# EAGLE board teabox (EAGLE 4.11), part 1 of 2
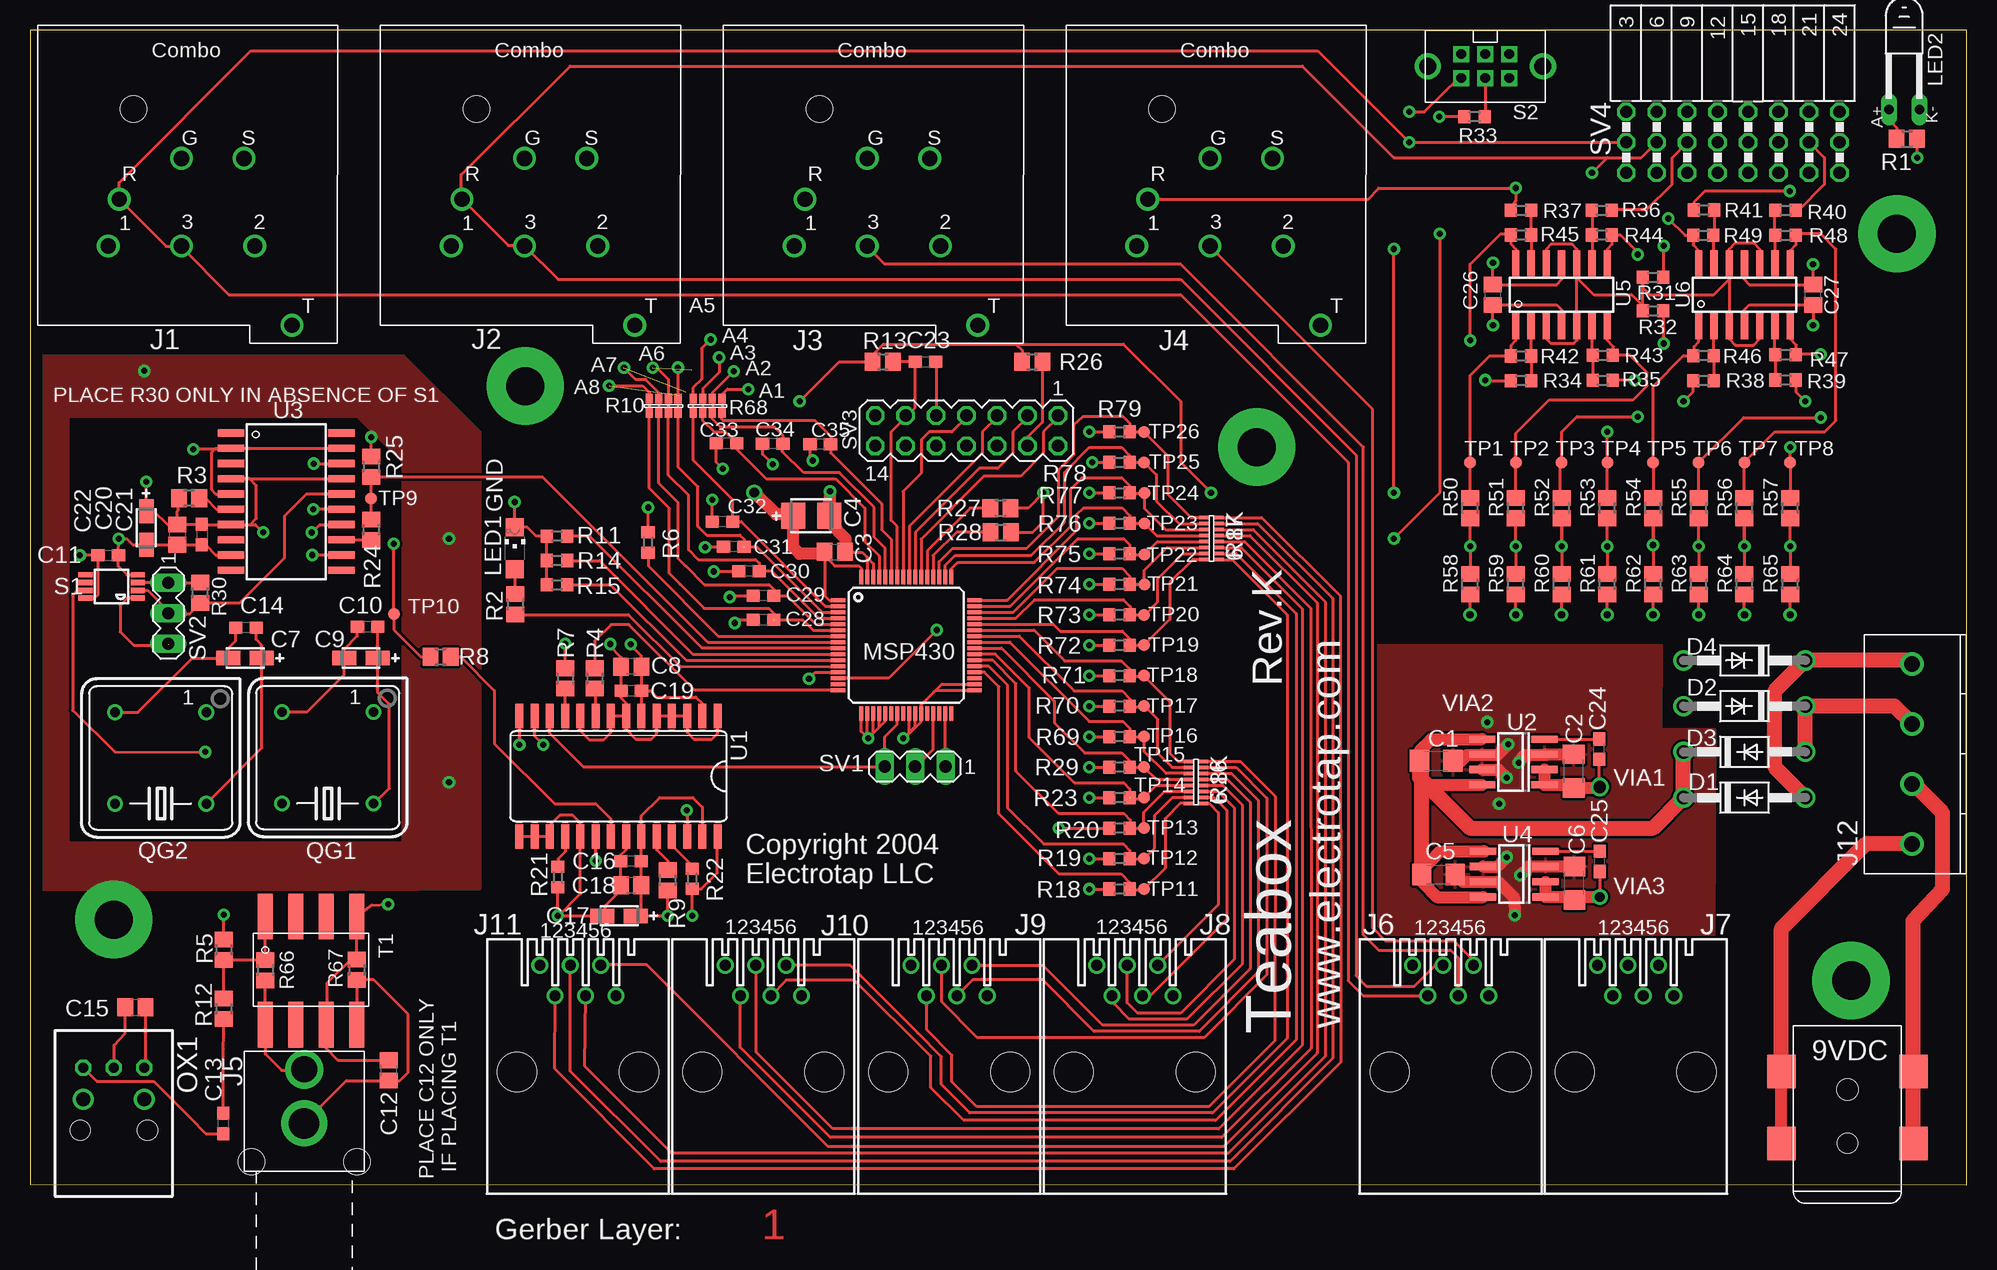
[diagram p0: board, top side]
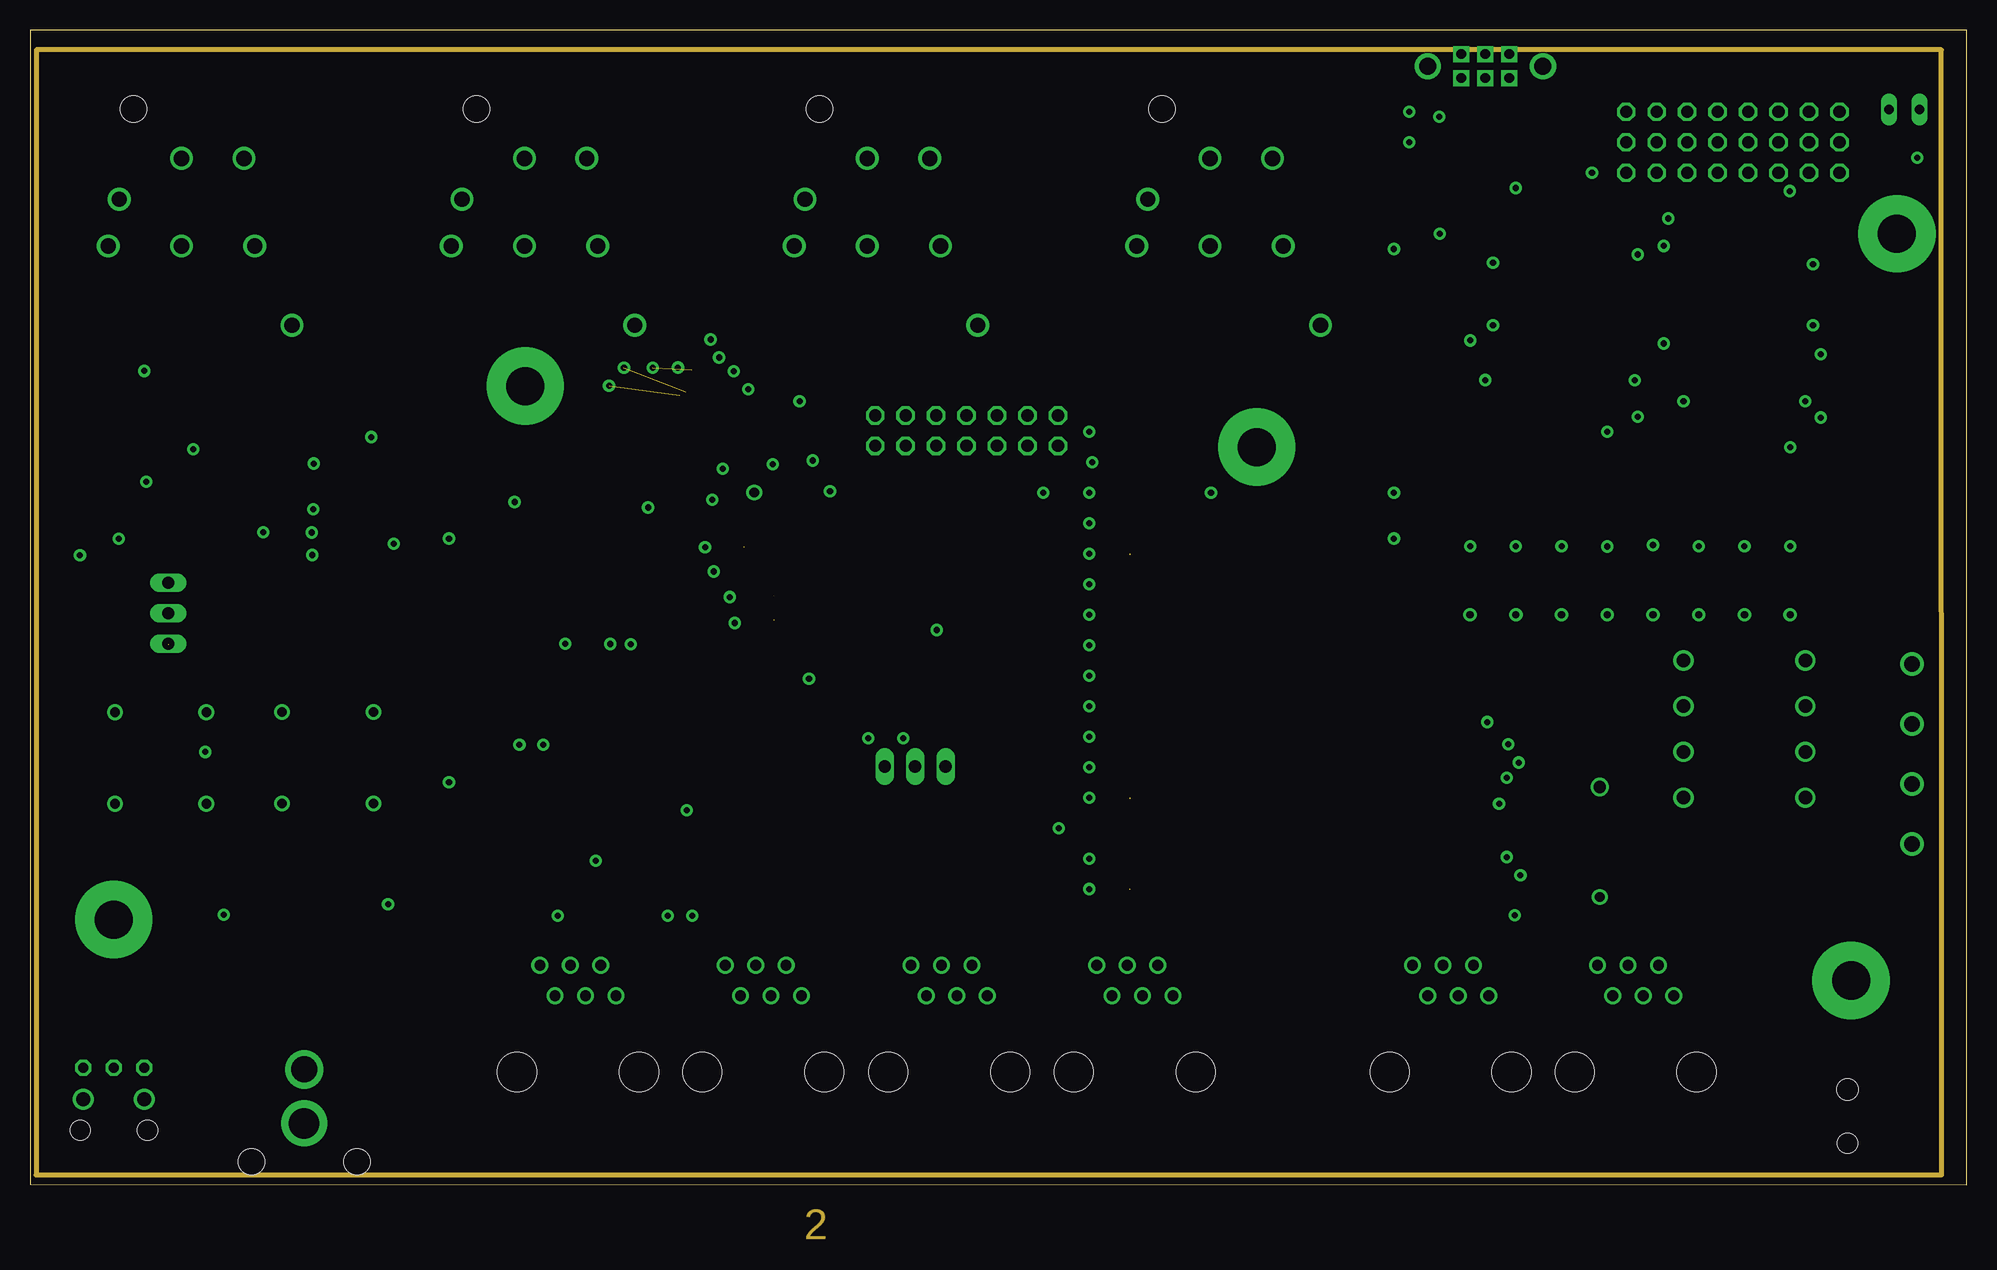
[diagram p1: board, inner layer $GND]
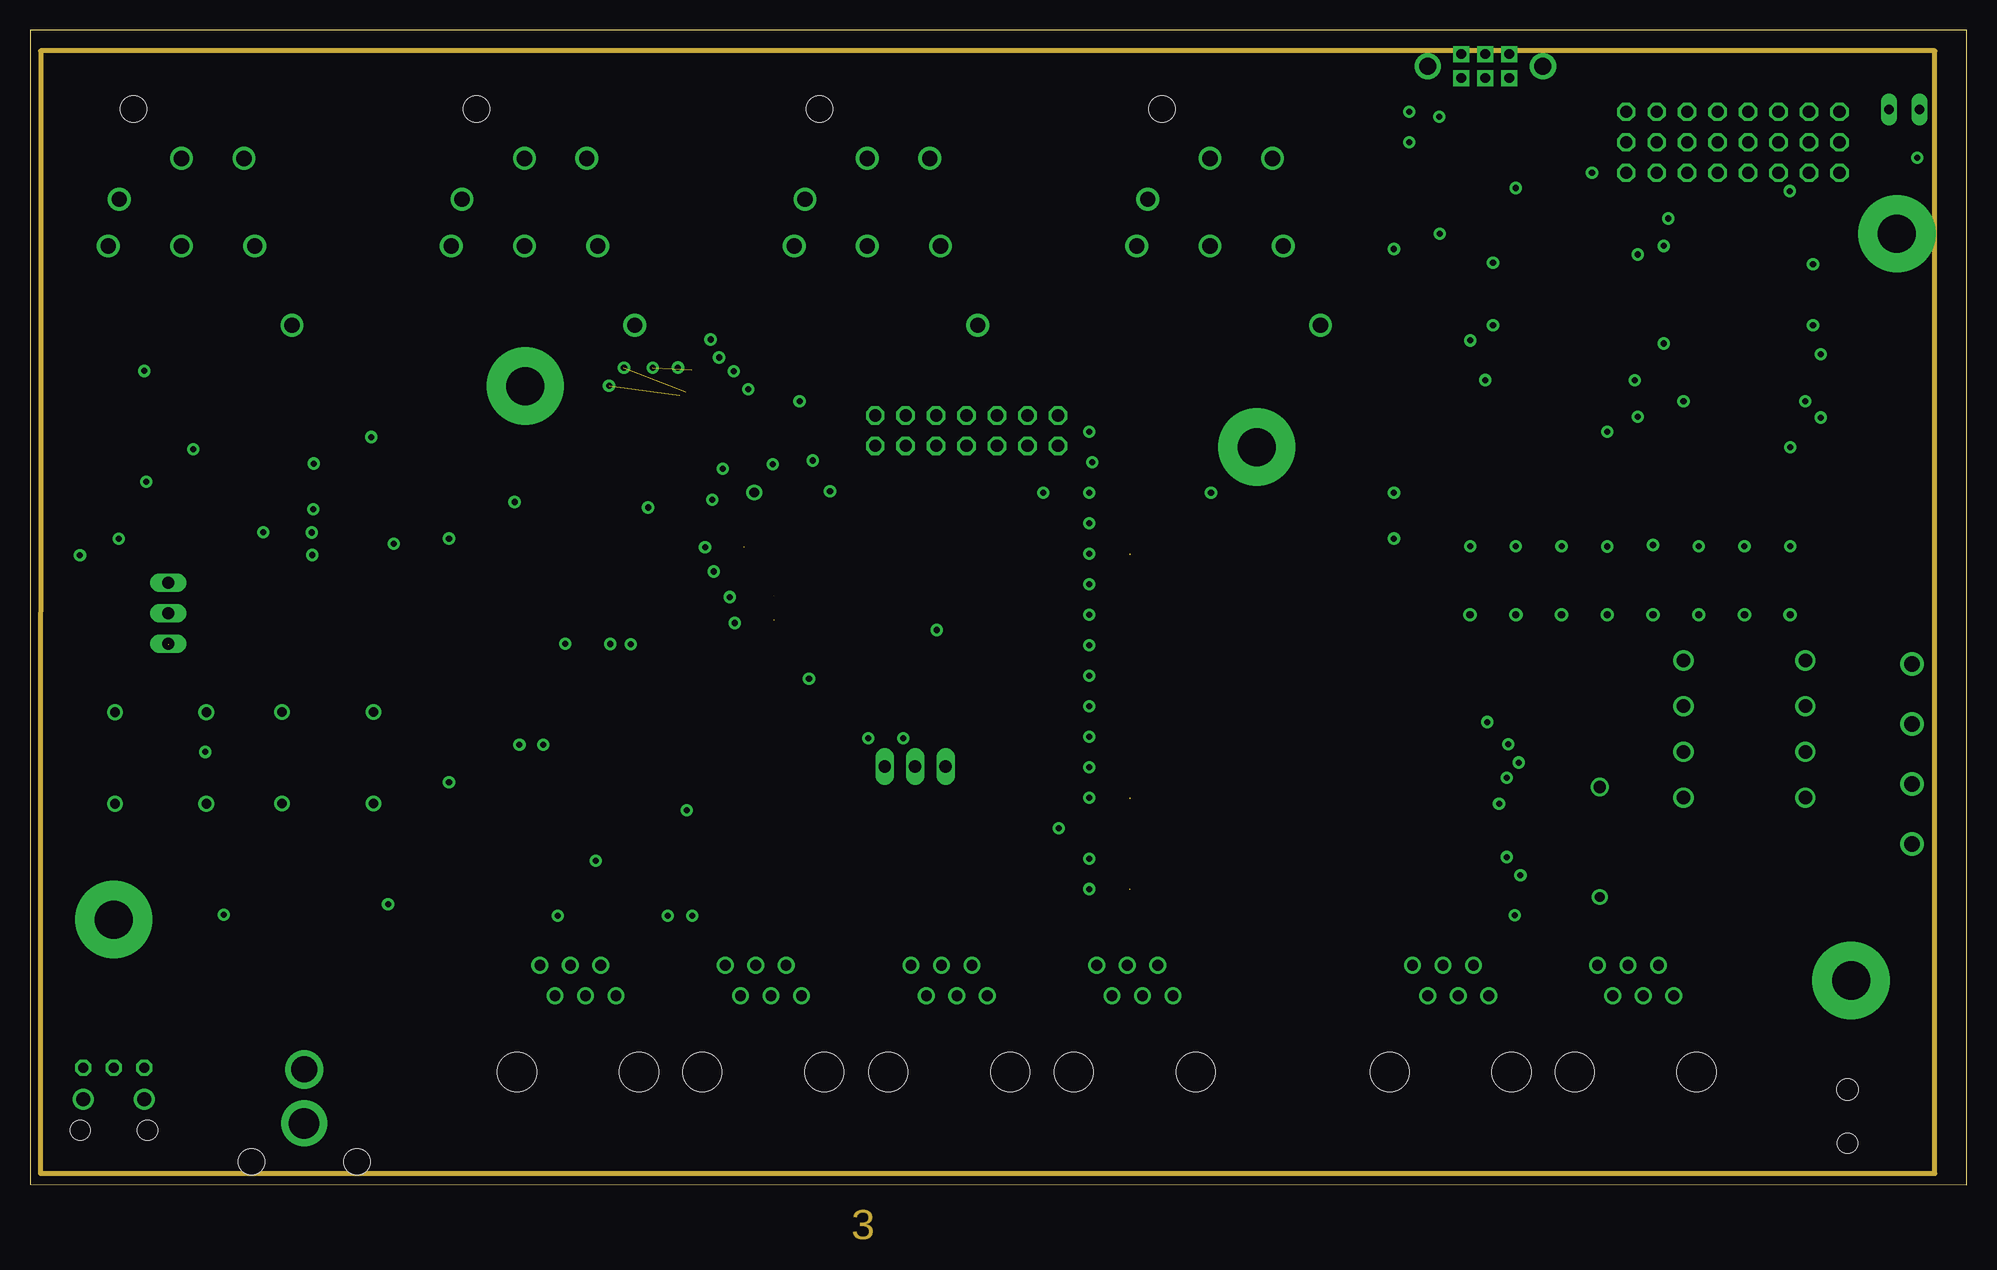
[diagram p2: board, inner layer $+5V]
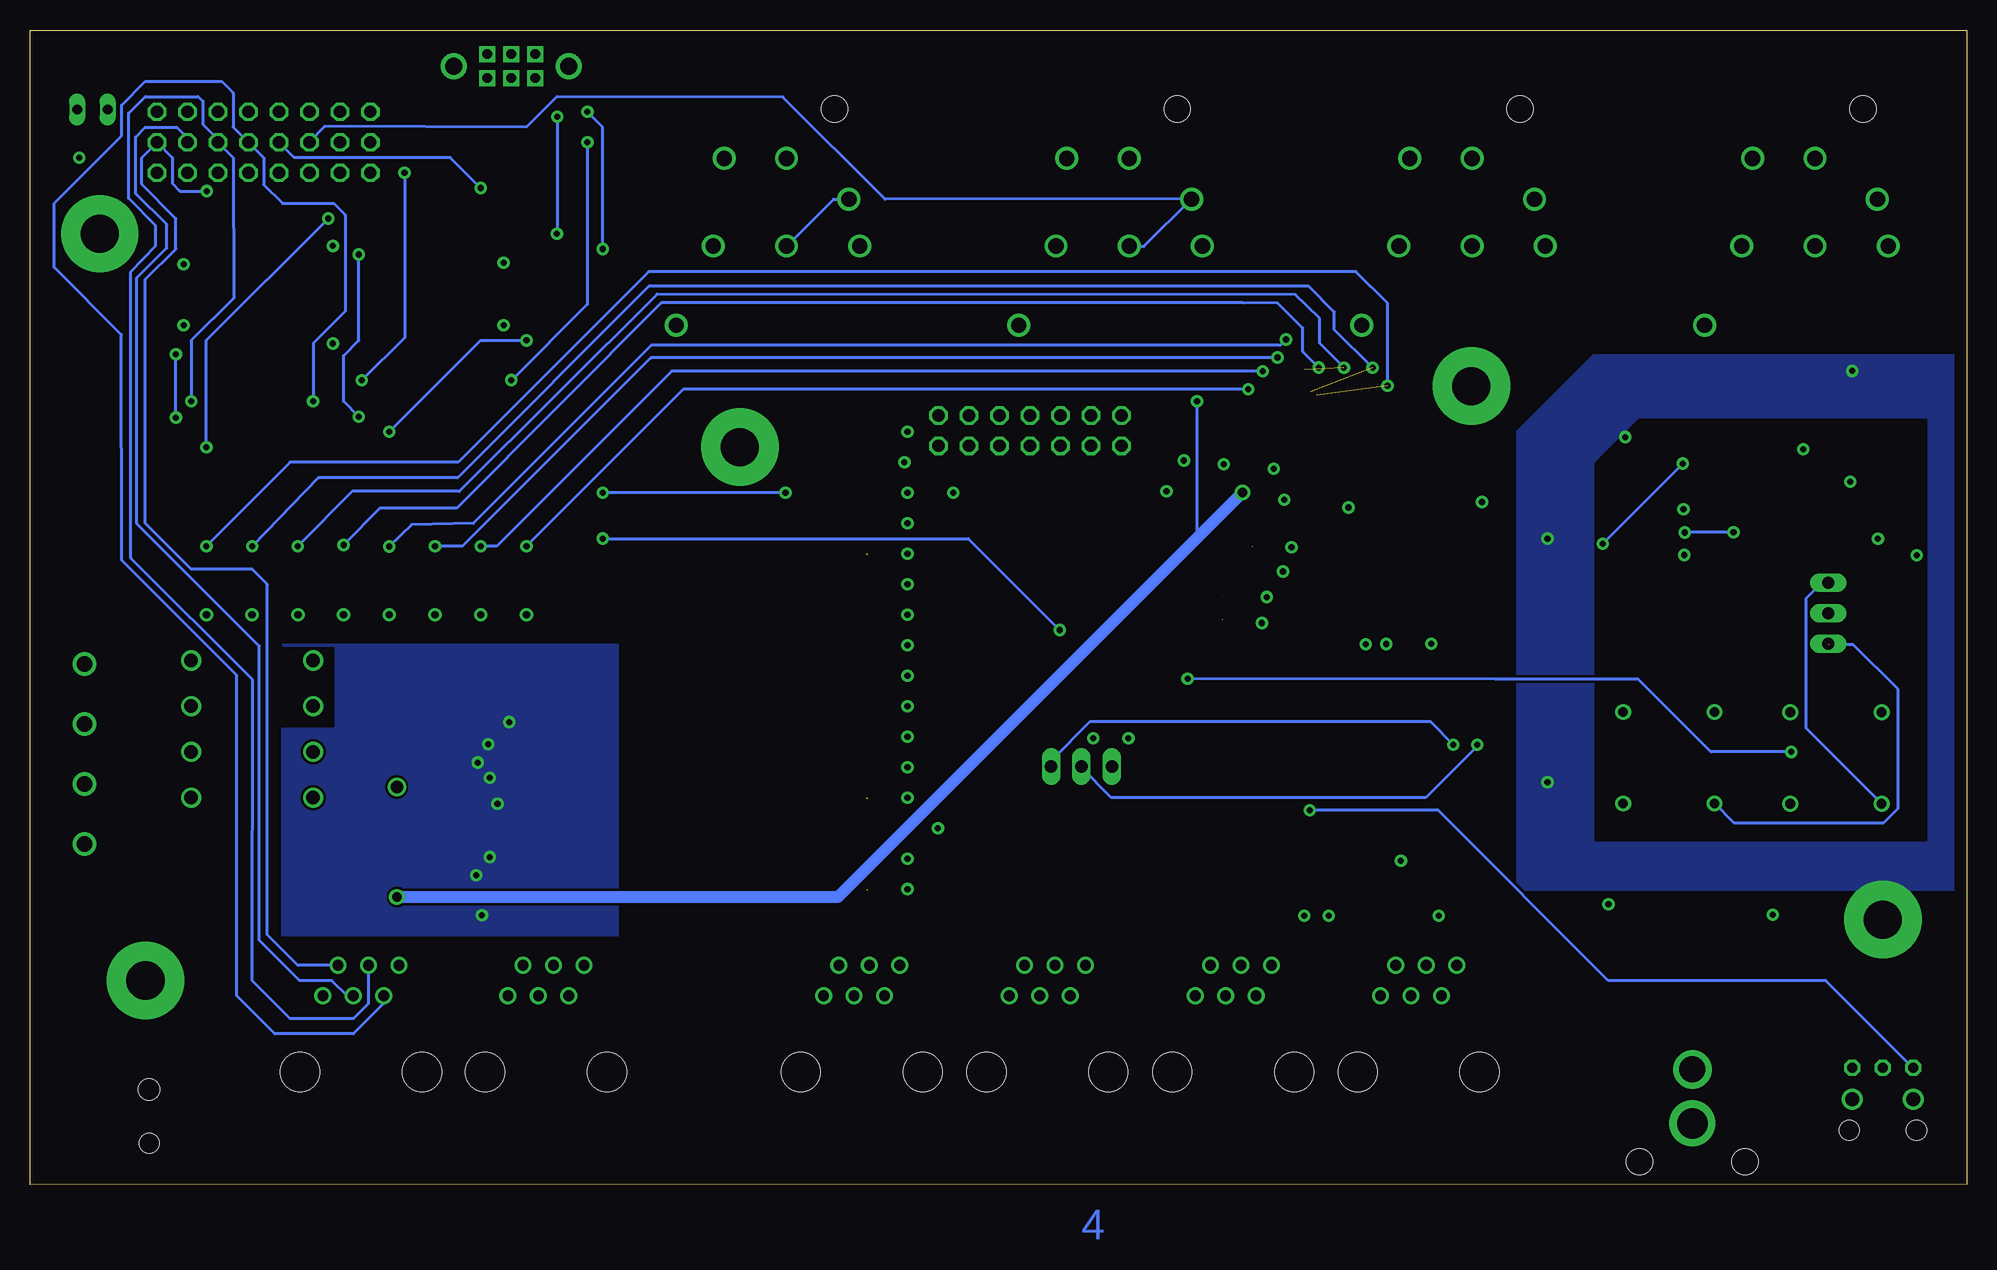
[diagram p3: board, bottom side, seen from below]

Size 161.38 x 96.22 mm. Coordinates in mm from the lower left corner, seen from the top.
Outline: 0,0.03 161.38,0 161.38,96.19 0,96.22 0,0.03
Copper layers (1*2+15*16): Top 0.035mm / dielectric 1.5mm / $GND 0.035mm / dielectric 0.15mm / $+5V 0.035mm / dielectric 0.2mm / Bottom 0.035mm
Design rules "default": minimum track width 10mil, minimum drill 20mil, track to track 8mil, track to pad 8mil, pad to pad 7mil, via to via 8mil, smd to smd 7mil, copper to edge 40mil, drill to drill 8mil, minimum pad ring 10mil, minimum via ring 10mil, stop-mask expansion 4mil, vias tented up to drill 0mil, thermal gap 10mil

## Footprints (pad centres in the part's own frame; a part is rotated, then mirrored left to right if it is on the bottom)
POWER_CONNECTOR = smd 2.4 x 2.8: +1 10,-5; +2 10,-11; -1 -1,-5; -2 -1,-11 | hole 1.778: 4.5,-9.5 | hole 1.676: 4.5,-5
C1206 = smd 1.6 x 1.8: 1 -1.4,0; 2 1.4,0
C0805 = smd 1.3 x 1.5: 1 -0.85,0; 2 0.85,0
CT3528 = smd 2 x 2.2: + 1.5,0; - -1.5,0
CT3216 = smd 2 x 1.2: + 1.4,0; - -1.4,0
C0603 = smd 1.1 x 1: 1 -0.85,0; 2 0.85,0
DO41-10 = drill 1.118 round: A 5.08,0; C -5.08,0
NEUTRIK_COMBO_CONNECTOR_H = drill 1.27 round: 1 5.9,6.6; 2 18.1,6.6; 3 12,6.6; G 12,13.9; R 6.8,10.5; S 17.2,13.9; T 21.2,0 | hole 2.184: 8,18
JACK_RCA_CUI_RCJ-04X = drill 2.54 pad 3.81 round: 1-GND 4,-5 | drill 2.184 pad 2.54 round: 2-SIG 8.5,-5 | hole 2.184: 0.8,-0.6; 0.8,-9.4
TELEPHONE_JACK = drill 0.889 round: 1 -3.175,8.89; 2 -1.905,6.35; 3 -0.635,8.89; 4 0.635,6.35; 5 1.905,8.89; 6 3.175,6.35 | hole 3.251: -5.08,0; 5.08,0
TERMINAL_BLOCK_4 = drill 1.3 round: P$1 2.5,0; P$2 7.5,0; P$3 12.5,0; P$4 17.5,0
CHIPLED_1206 = smd 1.5 x 1.5: A 0,-1.75; C 0,1.75
LED-3MM-RA = drill 0.813 long: A 3.62,-1.27; K 3.62,1.27
TQFP64-10X10 = smd 1.2 x 0.3: 1 -5.7,3.75; 2 -5.7,3.25; 3 -5.7,2.75; 4 -5.7,2.25; 5 -5.7,1.75; 6 -5.7,1.25; 7 -5.7,0.75; 8 -5.7,0.25; 9 -5.7,-0.25; 10 -5.7,-0.75; 11 -5.7,-1.25; 12 -5.7,-1.75; 13 -5.7,-2.25; 14 -5.7,-2.75; 15 -5.7,-3.25; 16 -5.7,-3.75; 33 5.7,-3.75; 34 5.7,-3.25; 35 5.7,-2.75; 36 5.7,-2.25; 37 5.7,-1.75; 38 5.7,-1.25; 39 5.7,-0.75; 40 5.7,-0.25; 41 5.7,0.25; 42 5.7,0.75; 43 5.7,1.25; 44 5.7,1.75; 45 5.7,2.25; 46 5.7,2.75; 47 5.7,3.25; 48 5.7,3.75 | smd 0.3 x 1.2: 17 -3.75,-5.7; 18 -3.25,-5.7; 19 -2.75,-5.7; 20 -2.25,-5.7; 21 -1.75,-5.7; 22 -1.25,-5.7; 23 -0.75,-5.7; 24 -0.25,-5.7; 25 0.25,-5.7; 26 0.75,-5.7; 27 1.25,-5.7; 28 1.75,-5.7; 29 2.25,-5.7; 30 2.75,-5.7; 31 3.25,-5.7; 32 3.75,-5.7; 49 3.75,5.7; 50 3.25,5.7; 51 2.75,5.7; 52 2.25,5.7; 53 1.75,5.7; 54 1.25,5.7; 55 0.75,5.7; 56 0.25,5.7; 57 -0.25,5.7; 58 -0.75,5.7; 59 -1.25,5.7; 60 -1.75,5.7; 61 -2.25,5.7; 62 -2.75,5.7; 63 -3.25,5.7; 64 -3.75,5.7
TOTX179P = drill 0.85 octagon: 1 -2.54,0; 2 0,0; 3 2.54,0 | drill 1.15 round: 4 2.54,2.625; 5 -2.54,2.625 | hole 1.676: 2.8,5.22; -2.8,5.22
DIL08S = drill 0.813 round: 1 -3.81,-3.81; 4 3.81,-3.81; 5 3.81,3.81; 8 -3.81,3.81
R0805 = smd 1.3 x 1.5: 1 -0.85,0; 2 0.85,0
R0603 = smd 1 x 1.1: 1 -0.85,0; 2 0.85,0
RESISTOR_ARRAY_0603X4 = smd 0.6 x 0.8: P$1 0.4,0.2; P$2 0.4,1.4; P$3 1.2,0.2; P$4 1.2,1.4; P$5 2,0.2; P$6 2,1.4; P$7 2.8,0.2; P$8 2.8,1.4
RESISTOR_ARRAY_0402X8 = smd 0.305 x 0.762: P$1 0.125,1.375; P$2 0.125,0.125; P$3 0.625,1.375; P$4 0.625,0.125; P$5 1.125,1.375; P$6 1.125,0.125; P$7 1.625,1.375; P$8 1.625,0.125; P$9 2.125,1.375; P$10 2.125,0.125; P$11 2.625,1.375; P$12 2.625,0.125; P$13 3.125,1.375; P$14 3.125,0.125; P$15 3.625,1.375; P$16 3.625,0.125
UMAX8 = smd 0.45 x 1.2: 1 -0.975,-2.175; 2 -0.325,-2.175; 3 0.325,-2.175; 4 0.975,-2.175; 5 0.975,2.175; 6 0.325,2.175; 7 -0.325,2.175; 8 -0.975,2.175
SWITCH-EG2211 = drill 1.422 pad 2.184 round: GND@1 -4.8,0; GND@2 4.8,0 | drill 0.813 pad 0.813 square: IN1 0,1; IN2 0,-1; OUT1A -2,1; OUT1B 2,1; OUT2A -2,-1; OUT2B 2,-1
MA03-1 = drill 1.016 long: 1 -2.54,0; 2 0,0; 3 2.54,0
MA07-2 = drill 1.016 octagon: 1 -7.62,-1.27; 2 -7.62,1.27; 3 -5.08,-1.27; 4 -5.08,1.27; 5 -2.54,-1.27; 6 -2.54,1.27; 7 0,-1.27; 8 0,1.27; 9 2.54,-1.27; 10 2.54,1.27; 11 5.08,-1.27; 12 5.08,1.27; 13 7.62,-1.27; 14 7.62,1.27
HEADER-FE-8X3 = drill 1.016 octagon: 1 8.89,3.81; 2 8.89,1.27; 3 8.89,-1.27; 4 6.35,3.81; 5 6.35,1.27; 6 6.35,-1.27; 7 3.81,3.81; 8 3.81,1.27; 9 3.81,-1.27; 10 1.27,3.81; 11 1.27,1.27; 12 1.27,-1.27; 13 -1.27,3.81; 14 -1.27,1.27; 15 -1.27,-1.27; 16 -3.81,3.81; 17 -3.81,1.27; 18 -3.81,-1.27; 19 -6.35,3.81; 20 -6.35,1.27; 21 -6.35,-1.27; 22 -8.89,3.81; 23 -8.89,1.27; 24 -8.89,-1.27
TRANSFORMER_SCHOTT_22133 = smd 3.81 x 1.27: 1 -1.397,-8.128; 2 -1.397,-5.588; 3 -1.397,-3.048; 4 -1.397,-0.508; 5 7.62,-0.508; 6 7.62,-3.048; 7 7.62,-5.588; 8 7.62,-8.128
TP10R = smd 1 x 1: TP 0,0
SO28L = smd 0.66 x 2.032: 1 -8.255,-5.029; 2 -6.985,-5.029; 3 -5.715,-5.029; 4 -4.445,-5.029; 5 -3.175,-5.029; 6 -1.905,-5.029; 7 -0.635,-5.029; 8 0.635,-5.029; 9 1.905,-5.029; 10 3.175,-5.029; 11 4.445,-5.029; 12 5.715,-5.029; 13 6.985,-5.029; 14 8.255,-5.029; 15 8.255,5.029; 16 6.985,5.029; 17 5.715,5.029; 18 4.445,5.029; 19 3.175,5.029; 20 1.905,5.029; 21 0.635,5.029; 22 -0.635,5.029; 23 -1.905,5.029; 24 -3.175,5.029; 25 -4.445,5.029; 26 -5.715,5.029; 27 -6.985,5.029; 28 -8.255,5.029
SOIC8 = smd 0.6 x 2.2: 1 -1.905,-2.6; 2 -0.635,-2.6; 3 0.635,-2.6; 4 1.905,-2.6; 5 1.905,2.6; 6 0.635,2.6; 7 -0.635,2.6; 8 -1.905,2.6
SO-20DW = smd 0.6 x 2.2: 1 -5.715,-4.6; 2 -4.445,-4.6; 3 -3.175,-4.6; 4 -1.905,-4.6; 5 -0.635,-4.6; 6 0.635,-4.6; 7 1.905,-4.6; 8 3.175,-4.6; 9 4.445,-4.6; 10 5.715,-4.6; 11 5.715,4.6; 12 4.445,4.6; 13 3.175,4.6; 14 1.905,4.6; 15 0.635,4.6; 16 -0.635,4.6; 17 -1.905,4.6; 18 -3.175,4.6; 19 -4.445,4.6; 20 -5.715,4.6
SO14 = smd 0.6 x 2.2: 1 -3.81,-2.6; 2 -2.54,-2.6; 3 -1.27,-2.6; 4 0,-2.6; 5 1.27,-2.6; 6 2.54,-2.6; 7 3.81,-2.6; 8 3.81,2.6; 9 2.54,2.6; 10 1.27,2.6; 11 0,2.6; 12 -1.27,2.6; 13 -2.54,2.6; 14 -3.81,2.6

## Placement (x,y rotation side)
9VDC  POWER_CONNECTOR  [POWER_CONNECTOR]  155.95,-1.56 180 top
C1  10uF  [C1206]  117.19,35.32 0 top
C2  10uF  [C1206]  128.65,34.46 90 top
C3  .1uF  [C0805]  67.05,52.72 0 top
C4  10uF/10V  [CT3528]  65.1,55.74 180 top
C5  10uF  [C1206]  117.37,25.84 0 top
C6  10uF  [C1206]  128.7,25.11 90 top
C7  1uF/16V  [CT3216]  17.93,43.88 0 top
C8  .1uF  [C0805]  50.11,43.17 180 top
C9  1uF/16V  [CT3216]  27.58,43.88 0 top
C10  1000pF  [C0603]  28.14,46.47 180 top
C11  .01uF  [C0603]  6.52,52.44 0 top
C12  22pF  [C0805]  29.92,9.51 90 top
C13  .01uF  [C0603]  16.12,5.09 90 top
C14  1000pF  [C0603]  18,46.42 180 top
C15  .1uF  [C0805]  8.78,14.77 0 top
C16  1000pF  [C0603]  50.08,26.96 180 top
C17  1uF/16V  [CT3216]  49.09,22.39 0 top
C18  .1uF  [C0805]  50.08,24.93 180 top
C19  1000pF  [C0603]  50.11,41.14 180 top
C20  .1uF  [C0805]  12.26,54.17 270 top
C21  1000pF  [C0603]  14.32,54.17 270 top
C22  1uF/16V  [CT3216]  9.7,54.72 90 top
C23  .01uF  [C0603]  74.62,68.57 0 top
C24  .01uF  [C0603]  130.75,36.28 90 top
C25  .01uF  [C0603]  130.83,26.94 90 top
C26  .1uF  [C0805]  121.91,74.16 90 top
C27  .1uF  [C0805]  148.59,74.16 90 top
C28  3900pF  [C0603]  61.13,47.05 180 top
C29  3900pF  [C0603]  61.13,49.09 180 top
C30  3900pF  [C0603]  59.91,51.12 180 top
C31  3900pF  [C0603]  58.64,53.15 180 top
C32  3900pF  [C0603]  57.7,55.23 180 top
C33  3900pF  [C0603]  58.03,61.76 180 top
C34  3900pF  [C0603]  61.89,61.73 180 top
C35  3900pF  [C0603]  65.86,61.71 180 top
D1  1N4001  [DO41-10]  142.87,32.25 0 top
D2  1N4001  [DO41-10]  142.87,36.06 0 top
D3  1N4001  [DO41-10]  142.87,39.87 180 top
D4  1N4001  [DO41-10]  142.87,43.68 180 top
J1  NEUTRIK_COMBO  [NEUTRIK_COMBO_CONNECTOR_H]  0.63,71.62 0 top
J2  NEUTRIK_COMBO  [NEUTRIK_COMBO_CONNECTOR_H]  29.2,71.62 0 top
J3  NEUTRIK_COMBO  [NEUTRIK_COMBO_CONNECTOR_H]  57.78,71.62 0 top
J4  NEUTRIK_COMBO  [NEUTRIK_COMBO_CONNECTOR_H]  86.34,71.62 0 top
J5  JACK_RCA_CUI_RCJ-04X  [JACK_RCA_CUI_RCJ-04X]  17.85,1.1 90 top
J6  [TELEPHONE_JACK]  118.38,9.39 0 top
J7  [TELEPHONE_JACK]  133.8,9.39 0 top
J8  [TELEPHONE_JACK]  92.07,9.39 0 top
J9  [TELEPHONE_JACK]  76.6,9.39 0 top
J10  [TELEPHONE_JACK]  61.11,9.39 0 top
J11  [TELEPHONE_JACK]  45.66,9.39 0 top
J12  [TERMINAL_BLOCK_4]  156.84,25.9 90 top
LED1  STATUS  [CHIPLED_1206]  40.41,53.02 0 top
LED2  [LED-3MM-RA]  156.18,93.21 270 top
MSP430  MSP430F147-148-149-(TQFP46-10MM)  [TQFP64-10X10]  73.02,44.95 0 top
OX1  TOTX179P  [TOTX179P]  6.98,9.74 180 top
QG1  12.288  [DIL08S]  24.81,35.57 180 top
QG2  11.2896  [DIL08S]  10.89,35.55 180 top
R1  1K  [R0805]  156.41,87.13 0 top
R2  1K  [R0805]  40.43,48.35 270 top
R3  47  [R0805]  13.25,57.19 180 top
R4  47  [R0805]  47.06,42.18 270 top
R5  90.9  [R0805]  16.15,19.57 270 top
R6  10K  [R0603]  51.51,53.51 270 top
R7  100  [R0805]  44.6,42.18 270 top
R8  100  [R0805]  34.21,43.98 0 top
R9  100  [R0805]  53.13,25.36 270 top
R10  [RESISTOR_ARRAY_0603X4]  51.2,64.1 0 top
R11  10K  [R0603]  43.91,54.04 0 top
R12  348  [R0805]  16.15,14.64 270 top
R13  100K  [R0805]  71.06,68.57 0 top
R14  10K  [R0603]  43.91,52.01 0 top
R15  10K  [R0603]  43.91,49.97 0 top
R16  6.8K  [RESISTOR_ARRAY_0402X8]  97.91,31.64 90 top
R17  6.8K  [RESISTOR_ARRAY_0402X8]  99.21,51.96 90 top
R18  10K  [R0603]  90.8,24.63 0 top
R19  10K  [R0603]  90.8,27.17 0 top
R20  10K  [R0603]  90.8,29.71 0 top
R21  10K  [R0603]  43.99,25.62 270 top
R22  10K  [R0603]  55.19,25.49 270 top
R23  10K  [R0603]  90.8,32.25 0 top
R24  560  [R0805]  28.42,54.57 270 top
R25  1K  [R0805]  28.44,59.83 270 top
R26  0  [R0805]  83.51,68.57 0 top
R27  100K  [R0805]  80.87,56.38 0 top
R28  100K  [R0805]  80.89,54.34 0 top
R29  10K  [R0603]  90.8,34.79 0 top
R30  0  [R0805]  14.19,49.31 90 top
R31  10K  [R0603]  135.25,75.6 0 top
R32  10K  [R0603]  135.25,72.81 180 top
R33  10K  [R0603]  120.39,88.99 180 top
R34  10K  [R0603]  124.25,66.99 180 top
R35  10K  [R0603]  131.06,67.02 0 top
R36  10K  [R0603]  130.98,81.19 0 top
R37  10K  [R0603]  124.25,81.19 180 top
R38  10K  [R0603]  139.47,66.99 180 top
R39  10K  [R0603]  146.3,67.04 0 top
R40  10K  [R0603]  146.3,81.19 0 top
R41  10K  [R0603]  139.49,81.22 180 top
R42  11.3K  [R0603]  124.25,69.05 0 top
R43  11.3K  [R0603]  131.06,69.1 180 top
R44  11.3K  [R0603]  130.98,79.13 180 top
R45  11.3K  [R0603]  124.25,79.13 0 top
R46  11.3K  [R0603]  139.47,69.08 0 top
R47  11.3K  [R0603]  146.3,69.15 180 top
R48  11.3K  [R0603]  146.3,79.11 180 top
R49  11.3K  [R0603]  139.44,79.11 0 top
R50  8.25K  [R0805]  120.01,56.38 90 top
R51  8.25K  [R0805]  123.82,56.38 90 top
R52  8.25K  [R0805]  127.63,56.38 90 top
R53  8.25K  [R0805]  131.44,56.38 90 top
R54  8.25K  [R0805]  135.25,56.38 90 top
R55  8.25K  [R0805]  139.06,56.38 90 top
R56  8.25K  [R0805]  142.87,56.38 90 top
R57  8.25K  [R0805]  146.68,56.38 90 top
R58  16K  [R0805]  120.01,50.03 90 top
R59  16K  [R0805]  123.82,50.03 90 top
R60  16K  [R0805]  127.63,50.03 90 top
R61  16K  [R0805]  131.44,50.03 90 top
R62  16K  [R0805]  135.25,50.03 90 top
R63  16K  [R0805]  139.06,50.03 90 top
R64  16K  [R0805]  142.87,50.03 90 top
R65  16K  [R0805]  146.68,50.03 90 top
R66  0  [R0805]  19.6,17.87 270 top
R67  0  [R0805]  27.22,17.89 270 top
R68  33K  [RESISTOR_ARRAY_0603X4]  54.86,64.1 0 top
R69  10K  [R0603]  90.8,37.33 0 top
R70  10K  [R0603]  90.8,39.87 0 top
R71  10K  [R0603]  90.8,42.41 0 top
R72  10K  [R0603]  90.8,44.95 0 top
R73  10K  [R0603]  90.8,47.49 0 top
R74  10K  [R0603]  90.8,50.03 0 top
R75  10K  [R0603]  90.8,52.57 0 top
R76  10K  [R0603]  90.8,55.11 0 top
R77  10K  [R0603]  90.8,57.65 0 top
R78  10K  [R0603]  90.8,60.19 0 top
R79  10K  [R0603]  90.8,62.73 0 top
S1  SWITCH-MAX4544CUA  [UMAX8]  6.8,49.85 90 top
S2  SWITCH-EG2211  [SWITCH-EG2211]  121.28,93.21 180 top
SV1  SPI  [MA03-1]  73.76,34.84 180 top
SV2  CLKSEL  [MA03-1]  11.53,47.61 270 top
SV3  JTAG  [MA07-2]  78.05,62.83 180 top
SV4  [HEADER-FE-8X3]  141.9,88.13 180 top
T1  37246  [TRANSFORMER_SCHOTT_22133]  27.73,20.94 270 top
TP1  PTR1TP10R  [TP10R]  120.01,60.19 0 top
TP2  PTR1TP10R  [TP10R]  123.82,60.19 0 top
TP3  PTR1TP10R  [TP10R]  127.63,60.19 0 top
TP4  PTR1TP10R  [TP10R]  131.44,60.19 0 top
TP5  PTR1TP10R  [TP10R]  135.25,60.19 0 top
TP6  PTR1TP10R  [TP10R]  139.06,60.19 0 top
TP7  PTR1TP10R  [TP10R]  142.87,60.19 0 top
TP8  PTR1TP10R  [TP10R]  146.68,60.19 0 top
TP9  PTR1TP10R  [TP10R]  28.42,57.19 0 top
TP10  PTR1TP10R  [TP10R]  30.32,47.54 0 top
TP11  PTR1TP10R  [TP10R]  92.83,24.63 0 top
TP12  PTR1TP10R  [TP10R]  92.83,27.17 0 top
TP13  PTR1TP10R  [TP10R]  92.83,29.71 0 top
TP14  PTR1TP10R  [TP10R]  92.83,32.25 0 top
TP15  PTR1TP10R  [TP10R]  92.83,34.79 0 top
TP16  PTR1TP10R  [TP10R]  92.83,37.33 0 top
TP17  PTR1TP10R  [TP10R]  92.83,39.87 0 top
TP18  PTR1TP10R  [TP10R]  92.83,42.41 0 top
TP19  PTR1TP10R  [TP10R]  92.83,44.95 0 top
TP20  PTR1TP10R  [TP10R]  92.83,47.49 0 top
TP21  PTR1TP10R  [TP10R]  92.86,50.03 0 top
TP22  PTR1TP10R  [TP10R]  92.86,52.49 0 top
TP23  PTR1TP10R  [TP10R]  92.86,55.11 0 top
TP24  PTR1TP10R  [TP10R]  92.86,57.65 0 top
TP25  PTR1TP10R  [TP10R]  92.83,60.19 0 top
TP26  PTR1TP10R  [TP10R]  92.83,62.73 0 top
U1  CS8405A_HWMODE-CS  [SO28L]  49.04,34.02 180 top
U2  5V  [SOIC8]  123.62,35.22 90 top
U3  CDC337  [SO-20DW]  21.36,56.91 270 top
U4  3.3V  [SOIC8]  123.69,25.87 90 top
U5  OPAMP-AD8608  [SO14]  127.63,74.16 0 top
U6  OPAMP-AD8608  [SO14]  142.87,74.16 0 top

## Library data of the parts
9VDC C1-C35 D1-D4 J1-J12 LED2 OX1 R10 R16 R17 R68 S1 S2 SV4 T1 U1-U6 = TEABOX-LIB
LED1 = led
MSP430 = texas-msp
QG1 QG2 = crystal
R1-R9 R11-R15 R18-R67 R69-R79 = rcl
SV1-SV3 = con-lstb
TP1-TP26 = testpad

## Nets
+3V3: C3.1 C4.+ C6.1 C25.1 MSP430.1 MSP430.64 R13.1 R26.1 S2.OUT1B U4.1 U4.2
+5V: C2.1 C7.+ C8.1 C9.+ C10.1 C11.1 C14.1 C15.1 C16.1 C17.+ C18.1 C19.1 C20.1 C21.1 C22.+ C24.1 C26.1 C27.1 J1.2 J1.T J2.2 J2.T J3.2 J3.T J4.2 J4.T J6.1 J7.1 J8.1 J9.1 J10.1 J11.1 OX1.2 QG1.8 QG2.8 R1.2 R3.2 R7.1 R9.2 R32.1 S1.8 SV4.3 SV4.6 SV4.9 SV4.12 SV4.15 SV4.18 SV4.21 SV4.24 U1.2 U1.6 U1.20 U1.23 U1.27 U2.1 U2.2 U3.4 U3.7 U3.14 U3.17 U5.4 U6.4
GND: C1.2 C2.2 C3.2 C4.- C5.2 C6.2 C7.- C8.2 C9.- C10.2 C11.2 C12.2 C14.2 C15.2 C16.2 C17.- C18.2 C19.2 C20.2 C21.2 C22.- C23.2 C26.2 C27.2 C28.2 C29.2 C30.2 C31.2 C32.2 C33.2 C34.2 C35.2 D3.A D4.A J1.1 J1.G J1.S J2.1 J2.G J2.S J3.1 J3.G J3.S J4.1 J4.G J4.S J6.6 J7.6 J8.6 J9.6 J10.6 J11.6 LED1.C LED2.K MSP430.17 MSP430.18 MSP430.19 MSP430.20 MSP430.21 MSP430.25 MSP430.26 MSP430.27 MSP430.33 MSP430.34 MSP430.62 MSP430.63 OX1.1 QG1.4 QG2.4 R5.1 R6.1 R11.1 R14.1 R15.1 R18.1 R19.1 R20.1 R21.2 R22.2 R23.1 R25.1 R27.2 R28.2 R29.1 R31.2 R58.1 R59.1 R60.1 R61.1 R62.1 R63.1 R64.1 R65.1 R67.1 R69.1 R70.1 R71.1 R72.1 R73.1 R74.1 R75.1 R76.1 R77.1 R78.1 R79.1 S1.4 S2.OUT1A SV3.9 SV4.1 SV4.4 SV4.7 SV4.10 SV4.13 SV4.16 SV4.19 SV4.22 T1.4 T1.6 U1.1 U1.3 U1.4 U1.5 U1.7 U1.8 U1.10 U1.15 U1.16 U1.17 U1.19 U1.22 U1.28 U2.3 U2.6 U2.7 U3.2 U3.5 U3.9 U3.12 U3.15 U3.19 U4.3 U4.6 U4.7 U5.11 U6.11
N$1: MSP430.31 SV1.1 U1.13
N$2: MSP430.29 SV1.2 U1.14
N$3: MSP430.23 SV1.3 U1.12
N$4: R7.2 U1.11
N$5: R8.2 U1.21
N$6: R31.1 R32.2 U5.3 U5.5 U5.10 U5.12 U6.3 U6.5 U6.10 U6.12
N$7: C13.1 OX1.3 U1.26
N$8: LED2.A R1.1
N$9: R4.2 U1.9
N$10: LED1.A R2.1
N$11: R9.1 U1.24
N$13: R8.1 TP10.TP U3.18
N$14: MSP430.8 R24.1 R25.2 TP9.TP
N$15: R3.1 U3.6
N$16: QG1.5 S1.1 SV2.3
N$17: R30.1 S1.2 SV2.2 U3.16
N$20: C34.1 MSP430.60 R68.P$5
N$21: C13.2 R12.2
N$22: R5.2 R12.1 R66.1 T1.1
N$23: C12.1 J5.1-GND R67.2 T1.5
N$24: J5.2-SIG R66.2 T1.8
N$25: MSP430.12 R2.2
N$26: MSP430.7 R6.2
N$27: D2.A D3.C J12.P$3
N$28: MSP430.9 R11.2
N$29: C1.1 C5.1 D1.C D2.C U2.5 U2.8 U4.5 U4.8
N$30: D1.A D4.C J12.P$4
N$31: MSP430.10 R14.2
N$32: MSP430.11 R15.2
N$33: R21.1 U1.18
N$34: C24.2 U2.4
N$35: MSP430.16 R4.1
N$36: 9VDC.-1 9VDC.-2 J12.P$2
N$37: C25.2 U4.4
N$38: C32.1 MSP430.2 R68.P$1
N$39: R22.1 U1.25
N$40: MSP430.13 S1.7
N$41: R38.1 R46.2 U6.2
N$42: QG2.5 R30.2 S1.3 SV2.1
N$43: R24.2 U3.13
N$44: C29.1 MSP430.5 R10.P$3
N$45: MSP430.57 SV3.7
N$46: MSP430.56 SV3.5
N$47: MSP430.55 SV3.3
N$57: MSP430.54 SV3.1
N$58: R26.2 SV3.4
N$59: MSP430.53 R27.1
N$60: MSP430.52 R28.1
N$64: R39.1 R47.2 U6.6
N$65: J8.5 R16.P$2
N$66: J8.4 R16.P$4
N$67: J8.3 R16.P$6
N$68: J8.2 R16.P$8
N$69: J9.5 R16.P$10
N$70: J9.4 R16.P$12
N$71: J9.3 R16.P$14
N$72: C23.1 MSP430.58 R13.2 SV3.11
N$73: R10.P$2 R57.1 R65.2
N$75: R40.1 R48.2 U6.9
N$76: R10.P$4 R56.1 R64.2
N$77: C28.1 MSP430.6 R10.P$1
N$79: R10.P$8 R54.1 R62.2
N$80: R10.P$6 R55.1 R63.2
N$81: R41.1 R49.2 U6.13
N$82: R34.1 R42.2 U5.2
N$83: R35.1 R43.2 U5.6
N$84: R36.1 R44.2 U5.9
N$85: R37.1 R45.2 U5.13
N$86: R42.1 R50.2 TP1.TP U5.1
N$87: R43.1 R51.2 TP2.TP U5.7
N$88: R44.1 R52.2 TP3.TP U5.8
N$89: R45.1 R53.2 TP4.TP U5.14
N$90: R46.1 R54.2 TP5.TP U6.1
N$91: R47.1 R55.2 TP6.TP U6.7
N$92: R48.1 R56.2 TP7.TP U6.8
N$93: R49.1 R57.2 TP8.TP U6.14
N$94: C35.1 MSP430.59 R68.P$7
N$97: C31.1 MSP430.3 R10.P$7
N$98: C30.1 MSP430.4 R10.P$5
N$99: C33.1 MSP430.61 R68.P$3
N$101: J9.2 R16.P$16
N$102: J4.3 J4.R J6.5 R37.2 SV4.11
N$103: J3.3 J3.R J6.4 R36.2 SV4.8
N$104: J2.3 J2.R J6.3 R35.2 SV4.5
N$105: J1.3 J1.R J6.2 R34.2 SV4.2
N$106: J7.2 R38.2 SV4.14
N$107: J7.3 R39.2 SV4.17
N$108: J7.4 R40.2 SV4.20
N$109: J7.5 R41.2 SV4.23
N$110: MSP430.14 R33.2
N$111: R33.1 S2.IN1
N$112: R53.1 R61.2 R68.P$2
N$114: R52.1 R60.2 R68.P$4
N$115: R51.1 R59.2 R68.P$6
N$116: R50.1 R58.2 R68.P$8
N$117: J10.5 R17.P$2
N$118: J10.4 R17.P$4
N$119: J10.3 R17.P$6
N$120: J10.2 R17.P$8
N$121: J11.5 R17.P$10
N$122: J11.4 R17.P$12
N$123: J11.3 R17.P$14
N$124: J11.2 R17.P$16
N$125: MSP430.36 R16.P$1 R18.2 TP11.TP
N$126: MSP430.37 R16.P$3 R19.2 TP12.TP
N$127: MSP430.38 R16.P$5 R20.2 TP13.TP
N$128: MSP430.39 R16.P$7 R23.2 TP14.TP
N$129: MSP430.40 R16.P$9 R29.2 TP15.TP
N$130: MSP430.41 R16.P$11 R69.2 TP16.TP
N$131: MSP430.42 R16.P$13 R70.2 TP17.TP
N$132: MSP430.43 R16.P$15 R71.2 TP18.TP
N$133: MSP430.44 R17.P$1 R72.2 TP19.TP
N$134: MSP430.45 R17.P$3 R73.2 TP20.TP
N$135: MSP430.46 R17.P$5 R74.2 TP21.TP
N$136: MSP430.47 R17.P$7 R75.2 TP22.TP
N$137: MSP430.48 R17.P$9 R76.2 TP23.TP
N$138: MSP430.49 R17.P$11 R77.2 TP24.TP
N$139: MSP430.50 R17.P$13 R78.2 TP25.TP
N$140: MSP430.51 R17.P$15 R79.2 TP26.TP
N$141: 9VDC.+1 9VDC.+2 J12.P$1